# Altium PCB PCB1.PcbDoc
Units mm, origin at the board's own origin, x right, y up, seen from the top; angles counter-clockwise.
Board outline 63.12 x 48.75 mm, 2 copper layers (Top Layer, Bottom Layer); 50 components, 67 nets, 264 pads, 78 vias.
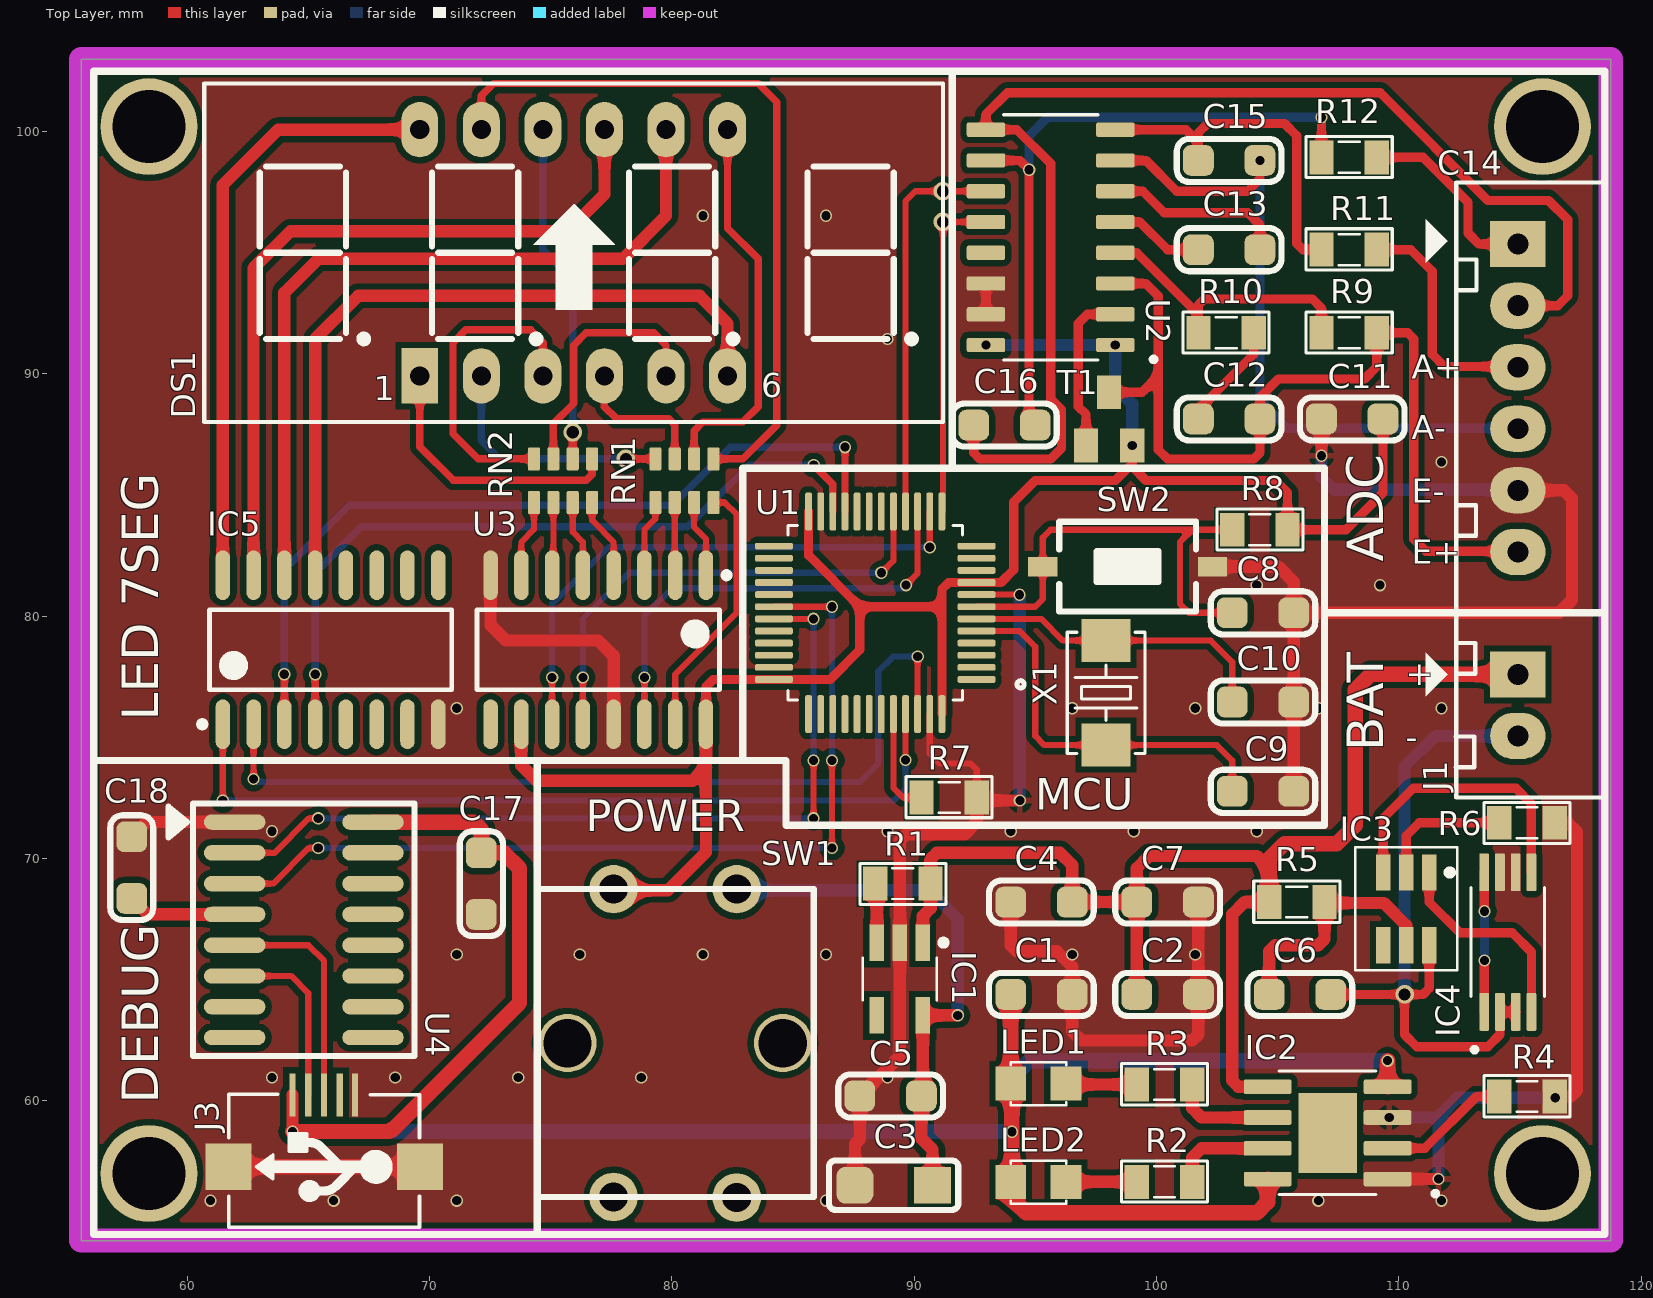
[diagram p0: Top Layer view]
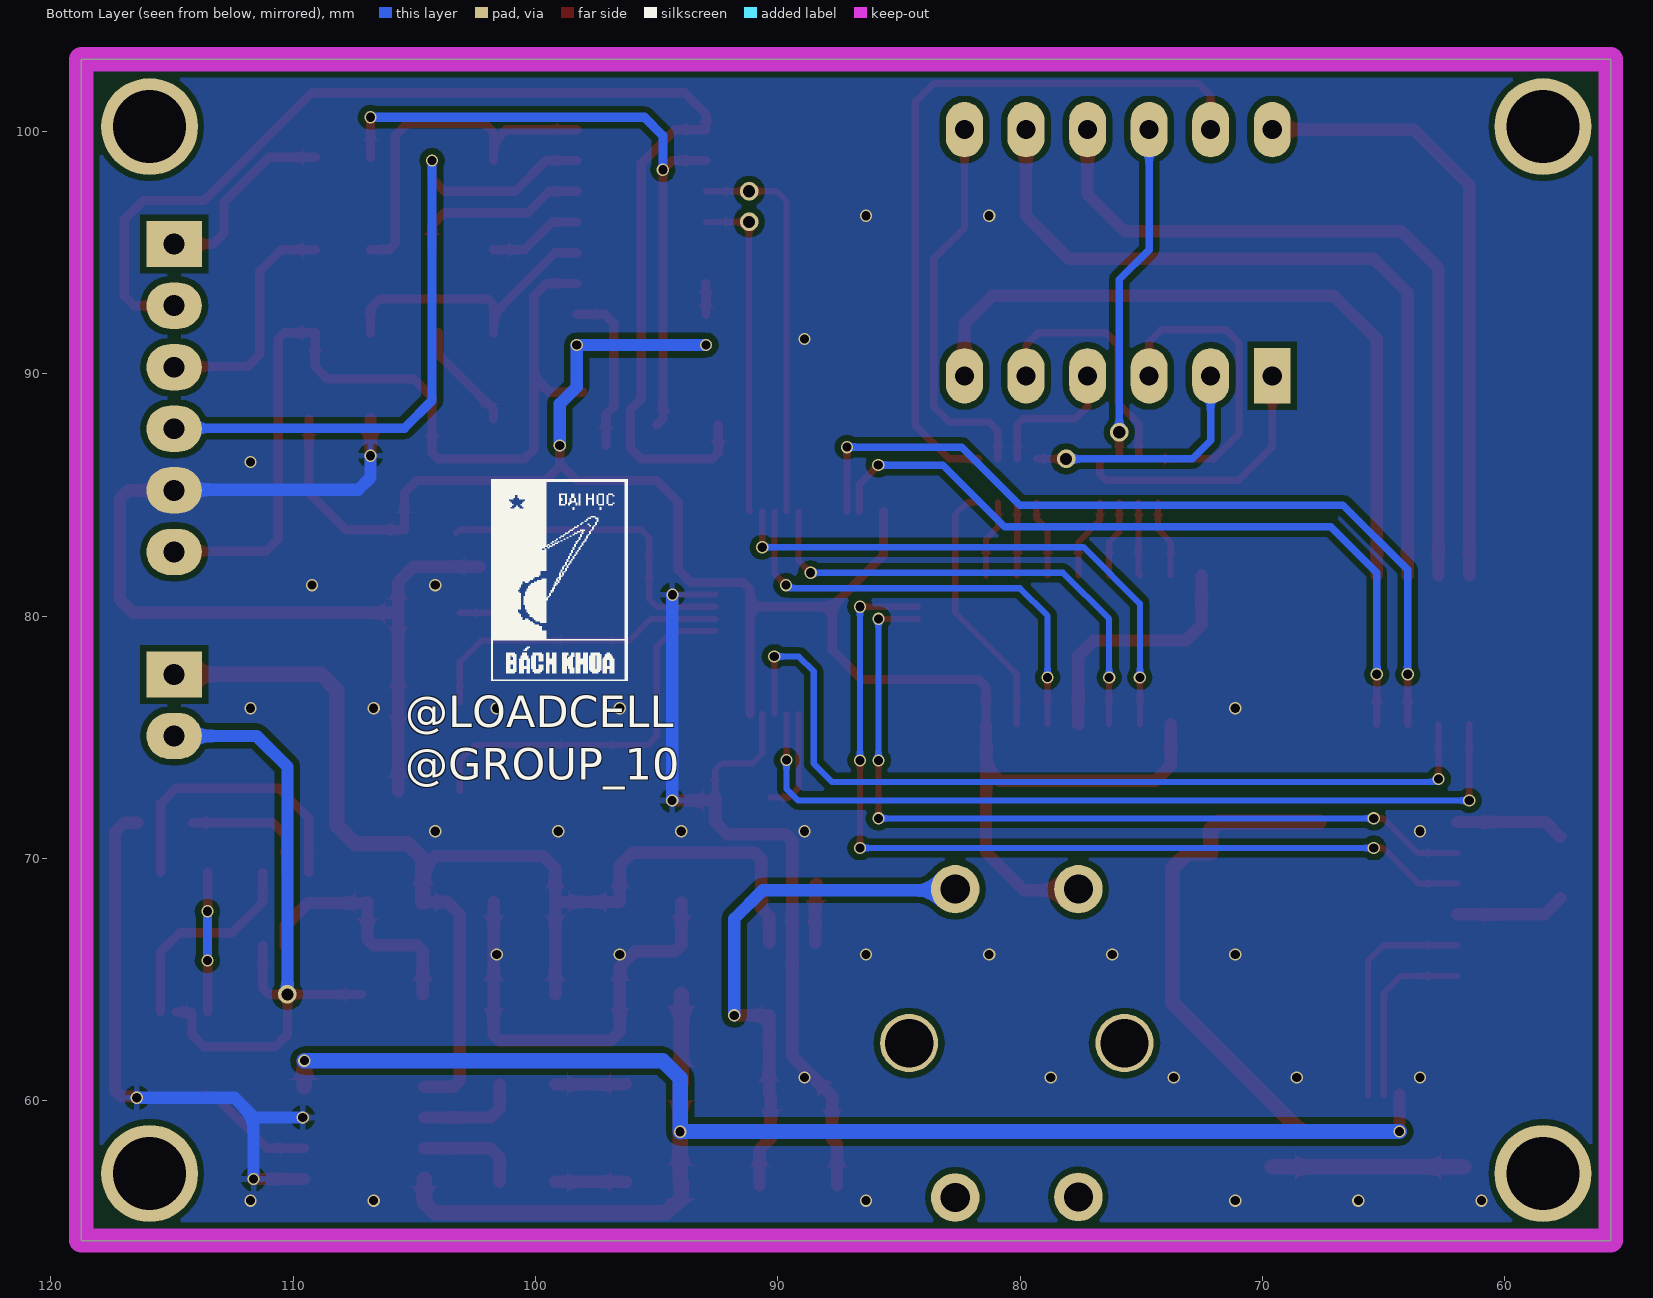
[diagram p1: Bottom Layer view, seen from below]

## Layer stack, top to bottom
Top Solder: solder mask 0.0102, Solder Resist, Dk 3.5
Top Layer: signal copper 0.0356
Dielectric 1: dielectric 0.32, FR-4, Dk 4.8
Bottom Layer: signal copper 0.0356
Bottom Solder: solder mask 0.0102, Solder Resist, Dk 3.5

## Board outline
55.626,54.229 55.626,102.981 118.745,102.981 118.745,54.229

## Design rules (kind name [scope] priority, off if disabled: settings)
Clearance [All] p1: gap=0.254 ignorepadtopadclearanceinfootprint=TRUE except(0: Arc-Hole Track-Hole SMDPad-Hole THPad-Hole Via-Hole Fill-Hole Poly-Hole Region-Hole Text-Hole)
DiffPairsRouting [All] p1: maxlimit=0.254 minlimit=0.254 mostfreqgap=0.254 toplayer_minwidth=0.381 toplayer_maxwidth=0.381 toplayer_prefwidth=0.381 bottomlayer_minwidth=0.381 bottomlayer_maxwidth=0.381 bottomlayer_prefwidth=0.381 maxuncoupledlength=12.7
PlaneConnect [All] p1: planeconnectstyle=Direct reliefexpansion=0.508 reliefentries=4 reliefconductorwidth=0.254 reliefairgap=0.254
PolygonConnect [All] p1: thpad.connectstyle=Direct thpad.reliefconductorwidth=0.254 thpad.reliefentries=4 thpad.polygonreliefangle="90 Angle" thpad.airgapwidth=0.254 smdpad.connectstyle=Direct smdpad.reliefconductorwidth=0.254 smdpad.reliefentries=4 smdpad.polygonreliefangle="90 Angle" smdpad.airgapwidth=0.254 via.connectstyle=Relief via.reliefconductorwidth=0.254 via.reliefentries=4 via.polygonreliefangle="90 Angle" via.airgapwidth=0.254
RoutingVias [All] p1: holewidth=0.381 width=0.508 viastyle="Through Hole" minholewidth=0.381 minwidth=0.508 maxholewidth=0.381 maxwidth=0.508
SolderMaskExpansion [All] p1: expansion=0.102
Width [All] p1: maxlimit=0.635 minlimit=0.254 preferedwidth=0.508
28 further rules are at their usual default settings.

## Classes and differential pairs
component class 7SEG: DS1 DS2 IC5 RN1 RN2 U3
component class Debug: C17 C18 J3 U4
component class Power: C1 C2 C3 C4 C5 C6 C7 IC1 IC2 IC3 IC4 J1 LED1 LED2 R1 R2 R3 R4 R5 R6 SW1
component class MCU: C8 C9 C10 R7 R8 SW2 U1 X1
component class "External ADC": C11 C12 C13 C14 C15 C16 R9 R10 R11 R12 T1 U2
differential pair D: +D_P -D_N

## Components (designator, comment, footprint, x,y, rotation, side; value= is the part's Value field where it differs from the comment)
C1 "100nF" CAP_0805 95.25,64.389 r0 top value=33p
C2 "100nF" CAP_0805 100.457,64.389 r180 top value=33p
C3 "220uF" CAP_TANTALUM_3216 89.154,56.515 r180 top
C4 "470nF" CAP_0805 95.25,68.199 r180 top value=33p
C5 "100nF" CAP_0805 89.027,60.198 r180 top value=33p
C6 "100nF" CAP_0805 105.918,64.389 r180 top value=33p
C7 "100nF" CAP_0805 100.457,68.199 r180 top value=33p
C8 "10uF" CAP_0805 104.394,80.137 r180 top value=33p
C9 "33pF" CAP_0805 104.394,72.771 r0 top value=33p
C10 "33pF" CAP_0805 104.394,76.454 r0 top value=33p
C11 "10uF" CAP_0805 108.077,88.138 r0 top value=33p
C12 "10uF" CAP_0805 102.997,88.138 r0 top value=33p
C13 "0.1uF" CAP_0805 102.997,95.123 r0 top value=33p
C14 "Header6" CON6 114.91,95.352 r270 top
C15 "10uF" CAP_0805 102.997,98.806 r0 top value=33p
C16 "0.1uF" CAP_0805 93.726,87.884 r180 top value=33p
C17 "10uF" CAP_0805 72.136,68.961 r90 top value=33p
C18 "100nF" CAP_0805 57.709,69.621 r270 top value=33p
DS1 "7SEGQ" LED7SEG-4-0.36 76.073,95.25 r0 top value="LED 7Q SEG"
IC1 "RT9013" SOT23-5 89.408,65.024 r270 top
IC2 "TP4056" SOP127P600X175-9N 107.061,58.674 r180 top
IC3 "DW01A" SOT23-6 110.302,67.921 r270 top
IC4 "FS8205A" FS8205A 114.554,66.548 r90 top
IC5 "ULN2003A" SOIC16 65.913,78.613 r90 top
J1 "JP2" CON2 114.91,77.597 r270 top
J3 "USB-5" USB-M1 65.646,60.245 r180 top
LED1 "LED" LED-0805-Red 93.98,60.706 r0 top value="LED 3 ly Single Colour"
LED2 "LED" LED-0805-Green 93.98,56.642 r0 top value="LED 3 ly Single Colour"
R1 "10k" RES-SMD-0805 89.535,68.961 r0 top
R2 "1k" RES-SMD-0805 100.33,56.655 r180 top
R3 "1k" RES-SMD-0805 100.33,60.668 r180 top
R4 "1k2" RES-SMD-0805 115.291,60.173 r180 top
R5 "10R" RES-SMD-0805 105.791,68.199 r180 top
R6 "1k" RES-SMD-0805 115.291,71.476 r0 top
R7 "100k" RES-SMD-0805 91.44,72.517 r180 top
R8 "10k" RES-SMD-0805 104.267,83.566 r180 top
R9 "20k" RES-SMD-0805 107.95,91.694 r180 top
R10 "8.2k" RES-SMD-0805 102.87,91.694 r180 top
R11 "1k" RES-SMD-0805 107.95,95.123 r180 top
R12 "1k" RES-SMD-0805 107.95,98.933 r180 top
RN1 "RP330" RN4-0805 80.518,85.587 r270 top
RN2 "RP330" RN4-0805 75.508,85.587 r270 top
SW1 "SW-4P-B" SW-4P-B 80.137,62.357 r270 top
SW2 "SW" SW-SMD 98.806,82.042 r180 top value="SW chip 2 pin"
T1 "BC857" SOT23-BEC 98.044,88.138 r0 top
U1 "STM32F103C8T6" QFP50P900X900X160-48N 88.392,80.137 r180 top
U2 "HX711" SOP127P600X180-16N 95.628,95.631 r180 top
U3 "74HC595" SOIC16 76.962,78.613 r270 top
U4 "CH340C" SO16 64.812,67.056 r0 top
X1 "8Mhz" X2-SMD-5.0X3.2X1.3MM 97.917,76.835 r270 top value=4Mhz

## Footprints (in the part's own frame and the unit in brackets; to place one, negate y for a bottom-side part, rotate by r counter-clockwise, add the part's x,y. Pads: shape width x height; smd on the part's side, far side on the other; paste and mask are expansions set on the pad)
CAP_0805 [mm]
  rrect50% 1.27x1.27 smd: 1(-1.27,0) 2(1.27,0)
  silkscreen extent -2.16,-0.89 2.16,0.89, body extent -1.01,-0.64 1.01,0.64, height 0.61
CAP_TANTALUM_3216 [mil]
  rect 60x60 smd: 1(-62.99,0)
  rrect50% 60x60 smd: 2(62.99,0)
  silkscreen extent -105,-40 105,40, body extent -67,-35 67,35, height 67
CON2 [mil] "CON2"
  rect 75x90 hole 34: 1(0,0)
  oval 75x90 hole 34: 2(100,0)
  silkscreen extent -100,-150 200,140, body extent -68,-70 168,107, height 236
CON6 [mil] "CON6"
  rect 75x90 hole 34: 1(0,0)
  oval 75x90 hole 34: 2(100,0) 3(200,0) 4(300,0) 5(400,0) 6(500,0)
  silkscreen extent -100,-150 600,140
FS8205A [mm]
  rrect25% 1.56x0.4 smd: 1(-2.88,1.031) 2(-2.88,0.381) 3(-2.88,-0.269) 4(-2.88,-0.919) 5(2.88,-0.919) 6(2.88,-0.269) 7(2.88,0.381) 8(2.88,1.031)
  silkscreen extent -4.54,-1.46 2.25,1.57, body extent -3.2,-1.4 3.2,1.53, height 1.2
LED7SEG-4-0.36 [mil]
  rect 60x90 hole 31: 1(-255,-210)
  oval 60x90 hole 31: 2(-155,-210) 3(-55,-210) 4(45,-210) 5(145,-210) 6(245,-210) 7(245,190) 8(145,190) 9(45,190) 10(-55,190) 11(-155,190) 12(-255,190)
  silkscreen extent -605,-285 595,265, body extent -596,-291 586,260, height 276
LED-0805-Green [mil]
  rect 50x55 smd: 1(0,0) 2(90,0)
  silkscreen extent 0,-35 90,35, body extent 5,-25 85,25, height 43
LED-0805-Red [mil]
  rect 50x55 smd: 1(0,0) 2(90,0)
  silkscreen extent 0,-35 90,35, body extent 5,-25 85,25, height 43
QFP50P900X900X160-48N [mm]
  rrect50% 1.56x0.28 smd: 1(-4.18,2.75) 2(-4.18,2.25) 3(-4.18,1.75) 4(-4.18,1.25) 5(-4.18,0.75) 6(-4.18,0.25) 7(-4.18,-0.25) 8(-4.18,-0.75) 9(-4.18,-1.25) 10(-4.18,-1.75) 11(-4.18,-2.25) 12(-4.18,-2.75) 25(4.18,-2.75) 26(4.18,-2.25) 27(4.18,-1.75) 28(4.18,-1.25) 29(4.18,-0.75) 30(4.18,-0.25) 31(4.18,0.25) 32(4.18,0.75) 33(4.18,1.25) 34(4.18,1.75) 35(4.18,2.25) 36(4.18,2.75)
  rrect50% 0.28x1.56 smd: 13(-2.75,-4.18) 14(-2.25,-4.18) 15(-1.75,-4.18) 16(-1.25,-4.18) 17(-0.75,-4.18) 18(-0.25,-4.18) 19(0.25,-4.18) 20(0.75,-4.18) 21(1.25,-4.18) 22(1.75,-4.18) 23(2.25,-4.18) 24(2.75,-4.18) 37(2.75,4.18) 38(2.25,4.18) 39(1.75,4.18) 40(1.25,4.18) 41(0.75,4.18) 42(0.25,4.18) 43(-0.25,4.18) 44(-0.75,4.18) 45(-1.25,4.18) 46(-1.75,4.18) 47(-2.25,4.18) 48(-2.75,4.18)
  silkscreen extent -6.15,-3.6 3.6,3.6, body extent -4.5,-4.5 4.5,4.5, height 0.72
RES-SMD-0805 [mil]
  rect 39.37x55 smd: 1(-45,0) 2(45,0)
  silkscreen extent -70,-34 70,33, body extent -39,-25 39,25, height 31
RN4-0805 [mm]
  round 0.254 on Mech15: 0(0,0)
  rrect25% 0.95x0.5 smd: 1(-0.9,1.2) 2(-0.9,0.4) 3(-0.9,-0.4) 4(-0.9,-1.2) 5(0.9,-1.2) 6(0.9,-0.4) 7(0.9,0.4) 8(0.9,1.2)
  Top Layer pour cut-out: -0.4,1.7 0.4,1.7 0.4,-1.7 -0.4,-1.7
  body extent -0.87,-1.68 0.88,1.67, height 0.7
SO16 [mm]
  oval 2.54x0.635 smd: 1(-2.854,4.445) 2(-2.854,3.175) 3(-2.854,1.905) 4(-2.854,0.635) 5(-2.854,-0.635) 6(-2.854,-1.905) 7(-2.854,-3.175) 8(-2.854,-4.445) 9(2.854,-4.445) 10(2.854,-3.175) 11(2.854,-1.905) 12(2.854,-0.635) 13(2.854,0.635) 14(2.854,1.905) 15(2.854,3.175) 16(2.854,4.445)
  silkscreen extent -5.59,-5.21 4.57,5.21, body extent -3.47,-4.95 3.47,4.95, height 1.75
SOIC16 [mm]
  oval 2.05x0.6 smd: 1(-3.075,4.445) 2(-3.075,3.175) 3(-3.075,1.905) 4(-3.075,0.635) 5(-3.075,-0.635) 6(-3.075,-1.905) 7(-3.075,-3.175) 8(-3.075,-4.445) 9(3.075,-4.445) 10(3.075,-3.175) 11(3.075,-1.905) 12(3.075,-0.635) 13(3.075,0.635) 14(3.075,1.905) 15(3.075,3.175) 16(3.075,4.445)
  silkscreen extent -3.2,-5 1.65,5.42, body extent -3,-5 3,5, height 1.75
SOP127P600X175-9N [mm]
  rrect25% 1.97x0.6 smd: 1(-2.475,1.905) 2(-2.475,0.635) 3(-2.475,-0.635) 4(-2.475,-1.905) 5(2.475,-1.905) 6(2.475,-0.635) 7(2.475,0.635) 8(2.475,1.905)
  rect 2.413x3.302 smd paste-3: 9(0,0)
  silkscreen extent -4.54,-2.55 2,2.6, body extent -3,-2.45 3,2.45, height 1.75
SOP127P600X180-16N [mm]
  rrect25% 1.58x0.59 smd: 1(-2.67,4.445) 2(-2.67,3.175) 3(-2.67,1.905) 4(-2.67,0.635) 5(-2.67,-0.635) 6(-2.67,-1.905) 7(-2.67,-3.175) 8(-2.67,-4.445) 9(2.67,-4.445) 10(2.67,-3.175) 11(2.67,-1.905) 12(2.67,-0.635) 13(2.67,0.635) 14(2.67,1.905) 15(2.67,3.175) 16(2.67,4.445)
  silkscreen extent -4.35,-5.06 1.95,5.13, body extent -3,-4.95 3,4.95, height 1.6
SOT23-5 [mm] "SOT23, 5-Leads, Body 3.0x3.0mm (max), Pitch 0.95mm, IPC Medium Density"
  rect 1.5x0.6 smd: 1(-1.5,0.95) 2(-1.5,0) 3(-1.5,-0.95) 4(1.5,-0.95) 5(1.5,0.95)
  silkscreen extent -1.62,-1.52 0.87,1.93, body extent -1.75,-1.52 1.75,1.53, height 1.45
SOT23-6 [mm] "SOT23, 5-Leads, Body 3.0x3.0mm (max), Pitch 0.95mm, IPC Medium Density"
  rect 1.5x0.6 smd: 1(-1.5,0.95) 2(-1.5,0) 3(-1.5,-0.95) 4(1.5,-0.95) 5(1.5,0) 6(1.5,0.95)
  silkscreen extent -2.54,-2.11 2.54,2.11, body extent -1.75,-1.52 1.75,1.53, height 1.45
SOT23-BEC [mm]
  rect 1x1.4 smd: B(-0.95,-1.1) C(0,1.1) E(0.95,-1.1)
SW-4P-B [mm] "Nut bam lon"
  round 2 hole 1.2: 1(-6.375,2.54) 2(-6.375,-2.54) 3(6.325,-2.54) 4(6.35,2.54)
  round 2.4 hole 2: ""(-0.025,4.445) ""(-0.025,-4.445)
  silkscreen extent -6.38,-5.72 6.32,5.72, body extent -6.94,-6 6.94,6, height 9.5
SW-SMD [mm] "Switch SMD type"
  rect 1.2x0.8 smd: 1(-3.5,0) 2(3.5,0)
  silkscreen extent -2.82,-1.85 2.82,1.85, body extent -3.05,-1.85 3.05,1.85, height 2.5
USB-M1 [mil]
  rect 10x70 smd: 1(51.18,0) 2(25.59,0) 3(0,0) 4(-25.59,0) 5(-50,0)
  rect 74.8x74.8 smd: 5(-155.51,116.84) 5(155.51,116.84)
  silkscreen extent -155,-1 155,215, body extent -157,5 158,218, height 107
X2-SMD-5.0X3.2X1.3MM [mil]
  rect 70x80 smd: 1(-85,0) 2(85,0)
  silkscreen extent -98,-63 98,63

## Part data
C1 C2 C4 C5 C6 C7 C8 C9 C10 C11 C12 C13 C15 C16 C17 C18: library part CapSMD, "Capacitor", LatestRevisionDate=17-Jul-2002, LatestRevisionNote="Re-released for DXP Platform.", PackageReference=RAD-0.3, Published=8-Jun-2000, Publisher="Altium Limited"
C3: library part "Cap Pol", "Polarized Capacitor (Axial)", LatestRevisionDate=17-Jul-2002, LatestRevisionNote="Re-released for DXP Platform.", PackageReference=POLAR0.8, Published=8-Jun-2000, Publisher="Altium Limited"
C14: "Header IDC, 6 x 1 Pin Vertical 2.54mm Pitch (Non-Boxed, Male)", Manufacturer="Würth Elektronik eiSos GmbH", partNo=613002143121, ComponentLink1 Description=Manufacturer, ComponentLink1URL=http://www.we-online.com, ComponentLink2 Description=Datasheet, ComponentLink2URL=http://katalog.we-online.de/em/datasheet/6130xx143121.pdf, Created by="Karrer Zheng", Created Date="29 March 2013", NoPins=02
DS1: library part LED7SEG-4, "Four 7 Seg Dipslay"
IC1: "RT9013-33GB IC REG LINEAR 3.3V 500mA SOT23-5"
IC2: "Complete single cell Li-Ion battery with a constant current / constant voltage linear charger"
IC3: "One Cell Lithium-ion/Polymer Battery Protection IC"
IC5: "High-Voltage, High-Current Darlington Array", LatestRevisionNote="Stylized 3D Model Added.", Publisher="Altium Limited"
J1: "WR-PHD 2.54 mm Angled Socket Header", Manufacturer="Würth Elektronik eiSos GmbH", partNo=613002143121, ComponentLink1 Description=Manufacturer, ComponentLink1URL=http://www.we-online.com, ComponentLink2 Description=Datasheet, ComponentLink2URL=http://katalog.we-online.de/em/datasheet/6130xx143121.pdf, Created by="Karrer Zheng", Created Date="29 March 2013", NoPins=02
J3: Manufacturer=FCI, Manufacturer Part Number=10118193-0001LF, Supplier Part Number 1=609-4616-1-ND, .Checked PCB=RF, .Checked SCH=MM, .Creator=MM, Category="Connectors, Interconnects", ComponentLink1Description=http://portal.fciconnect.com/Comergent//fci/drawing/10118193.pdf, ComponentLink1URL=http://portal.fciconnect.com/Comergent//fci/drawing/10118193.pdf, Connector Type="USB - micro B", Features="Shielded, Solder Retention", Gender=Receptacle, Ingress Protection=-, Mounting Type="Surface Mount, Right Angle, Horizontal", Number of Contacts=5, Packaging="Cut Tape (CT)", Pricing 1="1=0.46, 10=0.433, 25=0.3712, 50=0.3156, 100=0.3032, 250=0.27224, 500=0.25988 (USD)", RoHS="RoHS Compliant", Specifications="USB 2.0", Stock 1=28642, Supplier 1=Digi-Key
LED1 LED2: "LED Single colour Green and Red"
R1 R2 R3 R4: library part "Resistor - SMD", "Resistor", Manufacturer="Generic Components", Class=Passive, Published=08/06/2000, Publisher="Altium Hobart Technology Centre"
R5 R6 R7 R8 R9 R10 R11 R12: library part "Resistor - SMD", "Resistor SMD", Manufacturer="Generic Components", Class=Passive, Published=08/06/2000, Publisher="Altium Hobart Technology Centre"
RN1 RN2: library part RN4-Dual
SW1: library part SW-4PIN-BIG, "Switch Big 4 Pin", LatestRevisionDate=17-Jul-2002, LatestRevisionNote="Re-released for DXP Platform.", PackageReference=SPST-2, Published=24-Mar-1999, Publisher="Altium Limited"
SW2: library part SW2, "Switch button 2 pin"
T1: "Transistor PNP BC857 PHILIPS Ampere=1 V=30 SO", Package="SOT-23 NXP Semiconductors", Availability=Unavailable, MF="Nexperia USA", MP=BC857, Price=None, SnapEDA_Link=https://www.snapeda.com/parts/BC857/Nexperia%20USA%20Inc./view-part/53064/?ref=snap
U1: "ARM® Cortex®-M3 STM32F1 Microcontroller IC 32-Bit 72MHz 64KB (64K x 8) FLASH 48-LQFP (7x7)", Package="LQFP-48 STMicroelectronics", Availability="In Stock", Check_prices=https://www.snapeda.com/parts/STM32F103C8T6/STMicroelectronics/view-part/?ref=eda, MF=STMicroelectronics, MP=STM32F103C8T6, Price=None, Purchase-URL=https://pricing.snapeda.com/search/part/STM32F103C8T6/?ref=eda, SnapEDA_Link=https://www.snapeda.com/parts/STM32F103C8T6/STMicroelectronics/view-part/?ref=snap
U2: "Precision 24-bit analog-to-digital converter (ADC) designed for weigh scales and industrial control applications to interface directly with a bridge sensor.", Package=None, Availability="Not in stock", Check_prices=https://www.snapeda.com/parts/HX711/AVIA+SEMICONDUCTOR/view-part/?ref=eda, MF="AVIA SEMICONDUCTOR", MP=HX711, Price=None, SnapEDA_Link=https://www.snapeda.com/parts/HX711/AVIA+SEMICONDUCTOR/view-part/?ref=snap
U3: "8-bit Serial-Input/Serial or Parallel Output Shift Register with Latched 3-state Outputs"
U4: "USB to serial chip CH340", Package=Package, Availability=Unavailable, Check_prices=https://www.snapeda.com/parts/CH340C/WCH/view-part/5428851/?ref=eda, MF=WCH, MP=CH340C, Price=None, SnapEDA_Link=https://www.snapeda.com/parts/CH340C/WCH/view-part/5428851/?ref=snap
X1: library part XT2, "Crystal For all Crystal 2pin."

## Free pads (board coordinates)
  round 4 hole 3: 0(58.42,56.998) 0(58.42,100.203) 0(115.926,56.998) 0(115.926,100.203)

## Via types
v1: diameter 0.508, hole 0.381, Top Layer to Bottom Layer, 73 vias
v2: diameter 0.762, hole 0.508, Top Layer to Bottom Layer, 5 vias

## Nets (pads, with @x,y where several pads share a name; then routed paths per layer and width w, separated by ;. In a path a pad name is that pad's centre, name@x,y a point inside that pad or via, vN(x,y) a via of type N, cw(c..) or ccw(c..) an arc to the next point about the centre after c; other vN are vias at no path point)
3V3: C11.2 R8.1 SW1.2 T1.E U1.9 U1.24 U1.36 U1.48 U2.1 U2.16 U3.10 U3.16 | length 81.5
  Top Layer w0.381: U3.16 81.407,77.089 81.705,77.387 U1.36 86.531,77.387 87.757,78.613 87.757,80.391 ; U1.24 85.642,82.506 87.757,80.391 ; U1.48 91.142,80.391 ; U2.16 v1(92.964,91.186) ; 93.579,81.387 U1.9 91.42,81.387 91.142,81.109 91.142,80.391 ; 93.58,81.387 94.107,81.914 94.107,84.709 94.996,85.598 98.298,85.598 98.994,86.294 ; v1(98.994,87.038) 98.994,86.294 ; C11.2 109.347,85.09 107.823,83.566 R8.1 105.41,85.09 104.902,85.598 99.568,85.598 98.994,86.172 98.994,86.294 ; 87.757,80.391 91.142,80.391
  Top Layer w0.508: U3.10 73.787,73.838 74.422,73.203 80.848,73.203 81.407,73.762 ; SW1.2@77.597,68.682 79.832,68.682 81.407,70.256 81.407,73.762 ; U3.16 81.407,73.762
  Bottom Layer w0.508: v1(92.964,91.186) v1(98.298,91.186) 98.298,89.459 98.994,88.763 v1(98.994,87.038)
5V: C1.1 C17.2 IC2.4 IC2.8 J3.1 LED1.1 LED2.1 U4.16 | length 95.2
  Top Layer w0.508: v1(64.346,58.733) J3.1
  Top Layer w0.635: v1(64.346,58.733) 68.343,58.733 68.409,58.798 68.476,58.798 73.711,64.033 73.711,69.596 73.076,70.231 C17.2 72.136,71.196 71.831,71.501 U4.16 ; C1.1 LED1.1 94.031,60.655 v1(94.031,58.725) 94.031,56.693 LED2.1 93.98,56.007 94.615,55.372 104.14,55.372 104.586,55.818 IC2.8 ; IC2.4 v1(109.536,61.657)
  Bottom Layer w0.635: v1(64.346,58.733) 94.023,58.733 v1(94.031,58.725) 94.031,60.935 94.753,61.657 v1(109.536,61.657)
A: DS1.11 RN1.1 | length 30.6
  Top Layer w0.305: DS1.11 72.136,101.473 72.644,101.981 83.566,101.981 84.328,101.219 84.328,87.884 82.931,86.487 RN1.1
B: DS1.7 RN1.2 | length 16.2
  Top Layer w0.305: RN1.2 80.918,87.649 81.28,88.011 82.931,88.011 83.566,88.646 83.566,94.742 82.296,96.012 DS1.7
C: DS1.4 RN1.3 | length 5.9
  Top Layer w0.305: DS1.4 77.216,88.646 77.724,88.138 79.883,88.138 80.118,87.903 RN1.3
D: DS1.2 RN1.4 | length 10.2
  Top Layer w0.305: v2(78.105,86.487) RN1.4
  Bottom Layer w0.305: DS1.2 72.136,87.249 72.898,86.487 v2(78.105,86.487)
D_N: J3.2 U4.6 | length 7.5
  Top Layer w0.254: U4.6 64.287,65.151 64.996,64.442 J3.2
D_P: J3.3 U4.5 | length 9.5
  Top Layer w0.254: U4.5 64.999,66.421 65.646,65.774 J3.3
DIG0: DS1.6 IC5.13 | length 30.1
  Top Layer w0.508: IC5.13 65.278,91.44 67.056,93.218 81.153,93.218 82.296,92.075 DS1.6
DIG1: DS1.8 IC5.14 | length 32.3
  Top Layer w0.508: IC5.14 64.008,93.345 65.405,94.742 77.978,94.742 79.756,96.52 DS1.8
DIG2: DS1.9 IC5.15 | length 31.1
  Top Layer w0.508: IC5.15 62.738,94.361 64.262,95.885 75.692,95.885 77.216,97.409 DS1.9
DIG3: DS1.12 IC5.16 | length 25.2
  Top Layer w0.508: IC5.16 61.468,97.79 63.754,100.076 DS1.12
DP: DS1.3 RN2.4 | length 13.1
  Top Layer w0.305: RN2.4 72.009,86.487 70.968,87.528 70.968,91.288 71.501,91.821 74.168,91.821 74.676,91.313 DS1.3
E: DS1.1 RN2.1 | length 11.3
  Top Layer w0.305: DS1.1 69.596,86.995 70.985,85.606 76.462,85.606 76.708,85.852 RN2.1
F: DS1.10 RN2.2 | length 14.1
  Top Layer w0.305: RN2.2 v2(75.908,87.592)
  Bottom Layer w0.305: DS1.10 74.676,95.123 75.908,93.891 v2(75.908,87.592)
G: DS1.5 RN2.3 | length 10.5
  Top Layer w0.305: RN2.3 75.108,87.935 75.946,88.773 75.946,91.186 76.454,91.694 79.248,91.694 79.756,91.186 DS1.5
GND: C1.2 C2.1 C3.2 C4.2 C5.2 C7.1 C8.1 C9.2 C10.2 C11.1 C14.5 C17.1 C18.1 IC1.2 IC2.1 IC2.3 IC4.6 IC4.7 IC5.8 J3.5 R4.1 R6.2 R7.1 SW2.1 U1.8 U1.23 U1.35 U1.47 U2.14 U2.15 U3.8 U3.13 U4.1 | length 145
  Top Layer w0.254: U1.47 90.642,74.331 91.059,73.914 92.329,73.914 92.583,73.66 R7.1 ; U1.8 v1(94.349,80.887)
  Top Layer w0.381: U2.15 U2.14
  Top Layer w0.508: C18.1 58.318,71.501 U4.1 ; U3.8 72.517,79.629 73.152,78.994 76.962,78.994 77.597,78.359 U3.13 ; C3.2 87.554,58.217 87.757,58.42 C5.2 89.408,61.849 IC1.2 89.408,70.739 89.662,70.993 92.075,70.993 92.583,71.501 R7.1 92.71,72.39 v1(94.361,72.39) ; C4.2 93.98,66.421 94.234,66.167 95.885,66.167 96.52,65.532 C1.2 96.52,62.865 96.901,62.484 101.473,62.484 101.727,62.738 C2.1 C7.1 ; SW2.1 105.029,82.042 105.664,81.407 C8.1 ; C9.2 C10.2 C8.1 ; v1(106.807,86.614) C11.1 ; IC2.1 v1(111.633,56.769) ; IC2.3 v1(109.601,59.309) ; C14.5 116.815,85.192 117.145,84.861 117.145,80.67 116.611,80.137 C8.1 ; R4.1 117.094,60.173 117.352,60.43 117.352,71.095 116.971,71.476 R6.2
  Top Layer w0.635: J3.5@61.696,57.277 J3.5@69.596,57.277
  Bottom Layer w0.508: v1(94.349,80.887) 94.361,80.875 v1(94.361,72.39) ; v1(106.807,86.614) 106.807,85.725 107.315,85.217 114.884,85.217 C14.5 ; v1(109.601,59.309) 111.608,59.309 111.633,59.334 ; v1(111.633,56.769) 111.633,59.334 ; v1(116.459,60.122) 112.42,60.122 111.633,59.334
  other v1: 60.96,55.88 66.04,55.88 71.12,55.88 86.36,55.88 106.68,55.88 111.76,55.88 63.5,60.96 68.58,60.96 73.66,60.96 78.74,60.96 88.9,60.96 71.12,66.04 76.2,66.04 81.28,66.04 86.36,66.04 96.52,66.04 101.6,66.04 63.5,71.12 88.9,71.12 93.98,71.12 99.06,71.12 104.14,71.12 71.12,76.2 96.52,76.2 101.6,76.2 106.68,76.2 111.76,76.2 104.14,81.28 109.22,81.28 111.76,86.36 88.9,91.44 81.28,96.52 86.36,96.52
HX_AGND: C13.1 U2.5 | length 3.9
  Top Layer w0.381: U2.5 99.314,96.266 100.457,95.123 C13.1
HX_AVDD: C12.2 C14.6 R9.1 T1.C U2.3 | length 38.5
  Top Layer w0.381: T1.C 99.398,89.238 100.076,89.916 ; U2.3 99.559,93.726 100.076,93.209 100.076,89.916 ; C14.6 114.884,82.677 111.125,82.677 110.617,83.185 110.617,91.44 110.363,91.694 R9.1 109.093,90.297 108.585,89.789 105.029,89.789 104.267,89.027 C12.2 104.267,86.741 104.013,86.487 100.457,86.487 100.076,86.868 100.076,89.916
NetC3_1: C3.1 C5.1 IC1.5 SW1.1 | length 22.3
  Top Layer w0.508: C3.1 90.754,57.988 90.297,58.445 C5.1 90.358,60.259 IC1.5 v1(91.797,63.524)
  Bottom Layer w0.508: SW1.1@82.677,68.682 90.627,68.682 91.797,67.512 v1(91.797,63.524)
NetC6_1: C6.1 IC3.6 IC4.2 IC4.3 J1.2 | length 28.1
  Top Layer w0.381: C6.1 v2(110.236,64.389) ; IC3.6 111.252,64.643 110.998,64.389 v2(110.236,64.389) ; IC4.3 IC4.2 114.173,62.738 113.665,62.23 110.744,62.23 110.236,62.738 v2(110.236,64.389)
  Bottom Layer w0.508: v2(110.236,64.389) 110.236,73.787 111.506,75.057 J1.2
NetC6_2: C6.2 IC3.5 R5.1 | length 10.4
  Top Layer w0.508: C6.2 104.648,66.167 104.902,66.421 106.68,66.421 106.934,66.675 R5.1@106.934,68.163 ; R5.1 R5.1@106.934,68.163 ; IC3.5 110.302,67.244 109.383,68.163 R5.1@106.934,68.163
NetC9_1: C9.1 U1.5 X1.2 | length 16.2
  Top Layer w0.254: U1.5 94.349,79.387 ; 94.349,79.379 94.357,79.379 94.996,78.74 94.996,75.057 95.377,74.676 X1.2 102.489,74.676 103.124,74.041 C9.1
NetC10_1: C10.1 U1.6 X1.1 | length 12.9
  Top Layer w0.254: U1.6 95.25,79.887 95.25,79.883 96.139,78.994 X1.1 102.235,78.994 103.124,78.105 C10.1
NetC12_1: C12.1 R10.1 | length 4.5
  Top Layer w0.381: C12.1 101.727,88.519 104.013,90.805 R10.1
NetC13_2: C13.2 U2.6 | length 7.6
  Top Layer w0.381: U2.6 99.432,97.536 100.321,96.647 103.759,96.647 104.267,96.139 C13.2
NetC14_1: C14.1 R12.1 | length 8
  Top Layer w0.381: R12.1 110.998,98.933 112.852,97.079 112.852,95.809 113.309,95.352 C14.1
NetC14_2: C14.2 C16.2 U2.9 | length 52.8
  Top Layer w0.381: C16.2 92.456,86.741 92.71,86.487 95.631,86.487 96.075,86.931 96.075,88.517 95.631,88.962 95.631,98.679 94.234,100.076 U2.9 92.958,100.705 93.853,101.6 109.229,101.6 113.674,97.155 116.18,97.155 116.967,96.368 116.967,93.218 116.561,92.812 C14.2
NetC14_3: C14.3 R11.1 | length 9.8
  Top Layer w0.381: R11.1 110.49,95.123 111.379,94.234 111.379,90.805 111.887,90.297 114.884,90.297 C14.3
NetC14_4: C14.4 C15.2 U2.7 | length 28.5
  Top Layer w0.381: U2.7 99.568,98.806 100.838,97.536 103.759,97.536 104.267,98.044 v1(104.267,98.806)
  Bottom Layer w0.381: v1(104.267,98.806) 104.267,88.9 105.41,87.757 114.884,87.757 C14.4
NetC15_1: C15.1 R11.2 U2.8 | length 14.8
  Top Layer w0.381: U2.8 101.219,100.076 101.727,99.568 ; C15.1 101.727,99.568 ; R11.2 106.045,95.123 105.791,95.377 105.791,99.822 105.283,100.33 102.108,100.33 101.727,99.949 101.727,99.568
NetC16_1: C16.1 R12.2 U2.10 | length 28
  Top Layer w0.381: U2.10 94.361,98.806 v1(94.742,98.425) 94.742,88.138 C16.1 ; R12.2 v1(106.807,100.584)
  Bottom Layer w0.381: v1(94.742,98.425) 94.742,99.822 95.504,100.584 v1(106.807,100.584)
NetC18_2: C18.2 U4.4 | length 4.5
  Top Layer w0.508: C18.2 58.369,67.691 U4.4
NetIC1_3: IC1.3 R1.1 | length 2.5
  Top Layer w0.508: R1.1 88.458,68.895 IC1.3
NetIC2_2: IC2.2 R4.2 | length 5.5
  Top Layer w0.381: IC2.2 111.074,58.039 113.208,60.173 R4.2
NetIC2_6: IC2.6 R3.1 | length 4.2
  Top Layer w0.508: R3.1 101.473,59.69 101.854,59.309 IC2.6
NetIC2_7: IC2.7 R2.1 | length 4.3
  Top Layer w0.508: R2.1 101.473,57.658 101.854,58.039 IC2.7
NetIC3_1: IC3.1 IC4.4 | length 8.8
  Top Layer w0.381: IC3.1 111.252,68.199 112.522,66.929 114.681,66.929 115.473,66.137 IC4.4
NetIC3_2: IC3.2 R6.1 | length 5.6
  Top Layer w0.381: IC3.2 110.302,70.932 110.846,71.476 R6.1
NetIC3_3: IC3.3 IC4.5 | length 12
  Top Layer w0.381: IC3.3 109.352,71.658 110.592,72.898 114.833,72.898 115.468,72.264 115.468,69.433 IC4.5
NetIC4_1: IC4.1 IC4.8 | length 5.8
  Top Layer w0.381: IC4.1 113.523,65.771 v1(113.538,65.786) ; IC4.8 113.523,67.833 v1(113.538,67.818)
  Bottom Layer w0.381: v1(113.538,65.786) v1(113.538,67.818)
NetIC5_1: IC5.1 U1.45 | length 34.6
  Top Layer w0.254: v1(61.468,72.39) IC5.1 ; v1(89.642,74.061) U1.45
  Bottom Layer w0.254: v1(61.468,72.39) 89.154,72.39 89.642,72.878 v1(89.642,74.061)
NetIC5_2: IC5.2 U1.46 | length 36.5
  Top Layer w0.254: v1(62.738,73.279) IC5.2 ; U1.46 v1(90.142,78.331)
  Bottom Layer w0.254: v1(62.738,73.279) 62.865,73.152 87.757,73.152 88.519,73.914 88.519,77.724 89.126,78.331 v1(90.142,78.331)
NetIC5_3: IC5.3 U1.21 | length 34.3
  Top Layer w0.305: IC5.3 v1(64.008,77.597) ; U1.21 v1(87.142,86.975)
  Bottom Layer w0.305: v1(64.008,77.597) 64.008,81.915 66.675,84.582 80.01,84.582 82.403,86.975 v1(87.142,86.975)
NetIC5_4: IC5.4 U1.22 | length 30.9
  Top Layer w0.305: IC5.4 v1(65.278,77.597) ; v1(85.852,86.233) 86.642,85.443 U1.22
  Bottom Layer w0.305: v1(65.278,77.597) 65.278,81.788 67.183,83.693 80.645,83.693 83.185,86.233 v1(85.852,86.233)
NetLED1_2: LED1.2 R3.2 | length 2.9
  Top Layer w0.508: LED1.2 96.304,60.668 R3.2
NetLED2_2: LED2.2 R2.2 | length 2.9
  Top Layer w0.508: LED2.2 96.279,56.655 R2.2
NetR7_2: R7.2 U1.44 | length 4.4
  Top Layer w0.254: U1.44 89.142,72.91 89.535,72.517 R7.2
NetR9_2: R9.2 R10.2 U2.4 | length 12
  Top Layer w0.381: U2.4 99.187,94.996 101.727,92.456 ; R10.2 101.727,92.456 ; R9.2 106.807,92.71 106.426,93.091 101.981,93.091 101.727,92.837 101.727,92.456
NetRN1_5: RN1.5 U3.3 | length 3.2
  Top Layer w0.254: U3.3 78.867,83.566 79.318,84.017 RN1.5
NetRN1_6: RN1.6 U3.2 | length 3
  Top Layer w0.254: RN1.6 80.118,81.707 U3.2
NetRN1_7: RN1.7 U3.1 | length 3.2
  Top Layer w0.254: RN1.7 80.918,83.674 81.407,83.185 U3.1
NetRN1_8: RN1.8 U3.15 | length 10.9
  Top Layer w0.254: U3.15 80.137,77.597 82.677,80.137 82.677,84.201 82.191,84.687 RN1.8
NetRN2_5: RN2.5 U3.7 | length 3.2
  Top Layer w0.254: U3.7 73.787,83.058 74.308,83.579 RN2.5
NetRN2_6: RN2.6 U3.6 | length 3
  Top Layer w0.254: U3.6 75.108,81.739 RN2.6
NetRN2_7: RN2.7 U3.5 | length 3.2
  Top Layer w0.254: RN2.7 75.908,83.477 76.327,83.058 U3.5
NetRN2_8: RN2.8 U3.4 | length 3.4
  Top Layer w0.254: RN2.8 76.708,83.947 77.597,83.058 U3.4
NetT1_B: T1.B U2.2 | length 6.9
  Top Layer w0.381: T1.B 97.094,88.326 96.774,88.646 96.774,92.075 97.155,92.456 U2.2
NetU1_13: U1.13 U2.12 | length 13.7
  Top Layer w0.254: U1.13 U1.13@91.153,84.328 ; U1.13@91.163,84.317 91.186,84.34 v2(91.186,96.266) U2.12
NetU1_14: U1.14 U3.11 | length 23
  Top Layer w0.254: U3.11 v1(75.057,77.47) ; v1(90.642,82.84) U1.14
  Bottom Layer w0.254: v1(75.057,77.47) 75.057,80.518 77.379,82.84 v1(90.642,82.84)
NetU1_15: U1.15 U3.14 | length 19
  Top Layer w0.254: U3.14 v1(78.867,77.47) ; v1(89.662,81.28) 90.142,81.76 U1.15
  Bottom Layer w0.254: v1(78.867,77.47) 78.867,80.01 80.01,81.153 89.535,81.153 v1(89.662,81.28)
NetU1_16: U1.16 U2.11 | length 16.3
  Top Layer w0.254: U1.16 89.642,97.135 90.043,97.536 v2(91.186,97.536) U2.11
NetU1_17: U1.17 U3.12 | length 20.2
  Top Layer w0.254: U3.12 v1(76.327,77.47) ; v1(88.646,81.788) 89.142,82.284 U1.17
  Bottom Layer w0.254: v1(76.327,77.47) 76.327,79.883 78.232,81.788 v1(88.646,81.788)
NetU1_30: U1.30 U4.3 | length 37.6
  Top Layer w0.254: U4.3 63.551,68.961 65.024,70.434 v1(65.405,70.434) ; U1.30 v1(86.61,80.387) ; v1(86.61,70.434) v1(86.61,74.045)
  Bottom Layer w0.254: v1(65.405,70.434) v1(86.61,70.434) ; v1(86.61,74.045) v1(86.61,80.387)
NetU1_31: U1.31 U4.2 | length 34.3
  Top Layer w0.254: U4.2 63.602,70.231 65.024,71.653 v1(65.405,71.653) ; U1.31 v1(85.848,79.887) ; v1(85.848,71.653) v1(85.848,74.045)
  Bottom Layer w0.254: v1(65.405,71.653) v1(85.848,71.653) ; v1(85.848,74.045) v1(85.848,79.887)
RST: C8.2 R8.2 SW2.2 U1.7 | length 19.2
  Top Layer w0.254: U1.7 94.992,80.387 95.306,80.701 SW2.2 95.306,83.241 95.631,83.566 101.473,83.566 ; C8.2 101.346,80.137 100.965,80.518 100.965,83.058 101.473,83.566 ; R8.2@103.287,83.403 R8.2 101.473,83.566
VBAT: C2.2 C4.1 C7.2 IC1.1 IC2.5 J1.1 R1.2 R5.2 | length 53.7
  Top Layer w0.508: IC1.1 90.358,67.625 90.678,67.945 R1.2 90.678,69.977 90.932,70.231 96.012,70.231 96.52,69.723 C4.1 C7.2 ; C2.2 C7.2 ; IC2.5 103.378,60.579 103.124,60.833 103.124,67.691 103.632,68.199 R5.2 ; 104.648,69.596 104.14,70.104 99.695,70.104 99.187,69.596 C7.2
  Top Layer w0.635: R5.2 104.648,69.596 104.648,69.977 105.283,70.612 107.442,70.612 108.204,71.374 108.204,76.962 108.839,77.597 J1.1
pads on no net: IC1.4 IC2.9 IC3.4 IC5.5 IC5.6 IC5.7 IC5.9 IC5.10 IC5.11 IC5.12 J3.4 RN1.0 RN2.0 SW1. SW1.3 SW1.4 U1.1 U1.2 U1.3 U1.4 U1.10 U1.11 U1.12 U1.18 U1.19 U1.20 U1.25 U1.26 U1.27 U1.28 U1.29 U1.32 U1.33 U1.34 U1.37 U1.38 U1.39 U1.40 U1.41 U1.42 U1.43 U2.13 U3.9 U4.7 U4.8 U4.9 U4.10 U4.11 U4.12 U4.13 U4.14 U4.15

## Polygon pours and split planes (outlines as drawn)
GND on Top Layer (solid, remove dead copper, pour order 22): 55.626,102.981 55.626,54.229 118.745,54.229 118.745,102.981
no net on Top Layer "Top Layer-No Net" (solid, pour order 6): 74.549,61.468
no net on Top Layer "Top Layer-No Net 1" (solid, pour order 0): 74.549,61.468
GND on Bottom Layer (solid, remove dead copper, pour order 24): 55.626,102.981 118.745,102.981 118.745,54.229 55.626,54.229
no net on Bottom Layer "Bottom Layer-No Net" (solid, pour order 16): 55.397,102.794

## Keep-outs
Keep-Out Layer:
  the board outline again, w1

## Silkscreen, mask and mechanical layers (free items; w line width, h text height)
Top Overlay:
  lines w0.305: 56.134,74.041 59.182,74.041 82.931,74.041 ; 67.564,74.041 67.691,74.041 ; 73.304,74.041 84.709,74.041 ; 74.117,54.483 74.447,54.483 74.447,74.041 74.168,74.041 ; 84.709,54.483 118.491,54.483 118.491,81.407 ; 85.471,54.483 56.134,54.483 56.134,77.089 56.134,102.489 91.567,102.489 ; 91.567,102.108 91.567,102.489 ; 106.934,80.137 118.491,80.137 118.491,102.489 91.567,102.489 ; 82.931,74.041 84.709,74.041 ; 82.931,74.041 82.931,86.106 91.567,86.106 ; 84.709,74.041 84.709,71.374 106.934,71.374 106.934,81.153 106.934,86.106 91.567,86.106 ; 91.567,86.106 91.567,102.489
  text "A+" at 110.541,89.789 h1
  text "A-" at 110.541,87.3 h1
  text "E-" at 110.541,84.684 h1
  text "ADC" at 109.347,82.245 h1.5 r90
  text "E+" at 110.541,82.169 h1
  text "+" at 110.287,77.14 h1
  text "LED 7SEG" at 58.801,75.692 h1.5 r90
  text "-" at 110.287,74.524 h1
  text "BAT" at 109.347,74.422 h1.5 r90
  text "MCU" at 94.996,72.009 h1.3
  text "POWER" at 76.454,71.12 h1.3
  text "DEBUG" at 58.801,59.868 h1.5 r90
Bottom Overlay:
  drawing of 697 lines, arcs and shapes, not listed
  text "@LOADCELL" at 105.385,75.413 h1.3
  text "@GROUP_10" at 105.385,73.254 h1.3

## Dimensions
55.626,102.981 to 55.626,54.229 on Mechanical 15
55.626,102.981 to 118.745,102.981 on Mechanical 15

## Text inside footprints (layer, text, board x,y; h text height)
DS1: Top Overlay "6" at 83.693,89.027 h1; Top Overlay "1" at 67.691,88.9 h1